# Altium PCB Remote_ASK_PCB.PcbDoc
Units mm, origin at the board's own origin, x right, y up, seen from the top; angles counter-clockwise.
Board outline 40 x 41.27 mm, 2 copper layers (Top Layer, Bottom Layer), stack 1.569 mm thick; 28 components, 18 nets, 88 pads, 0 vias.
Unrouted connection lines stored in the file: 3.
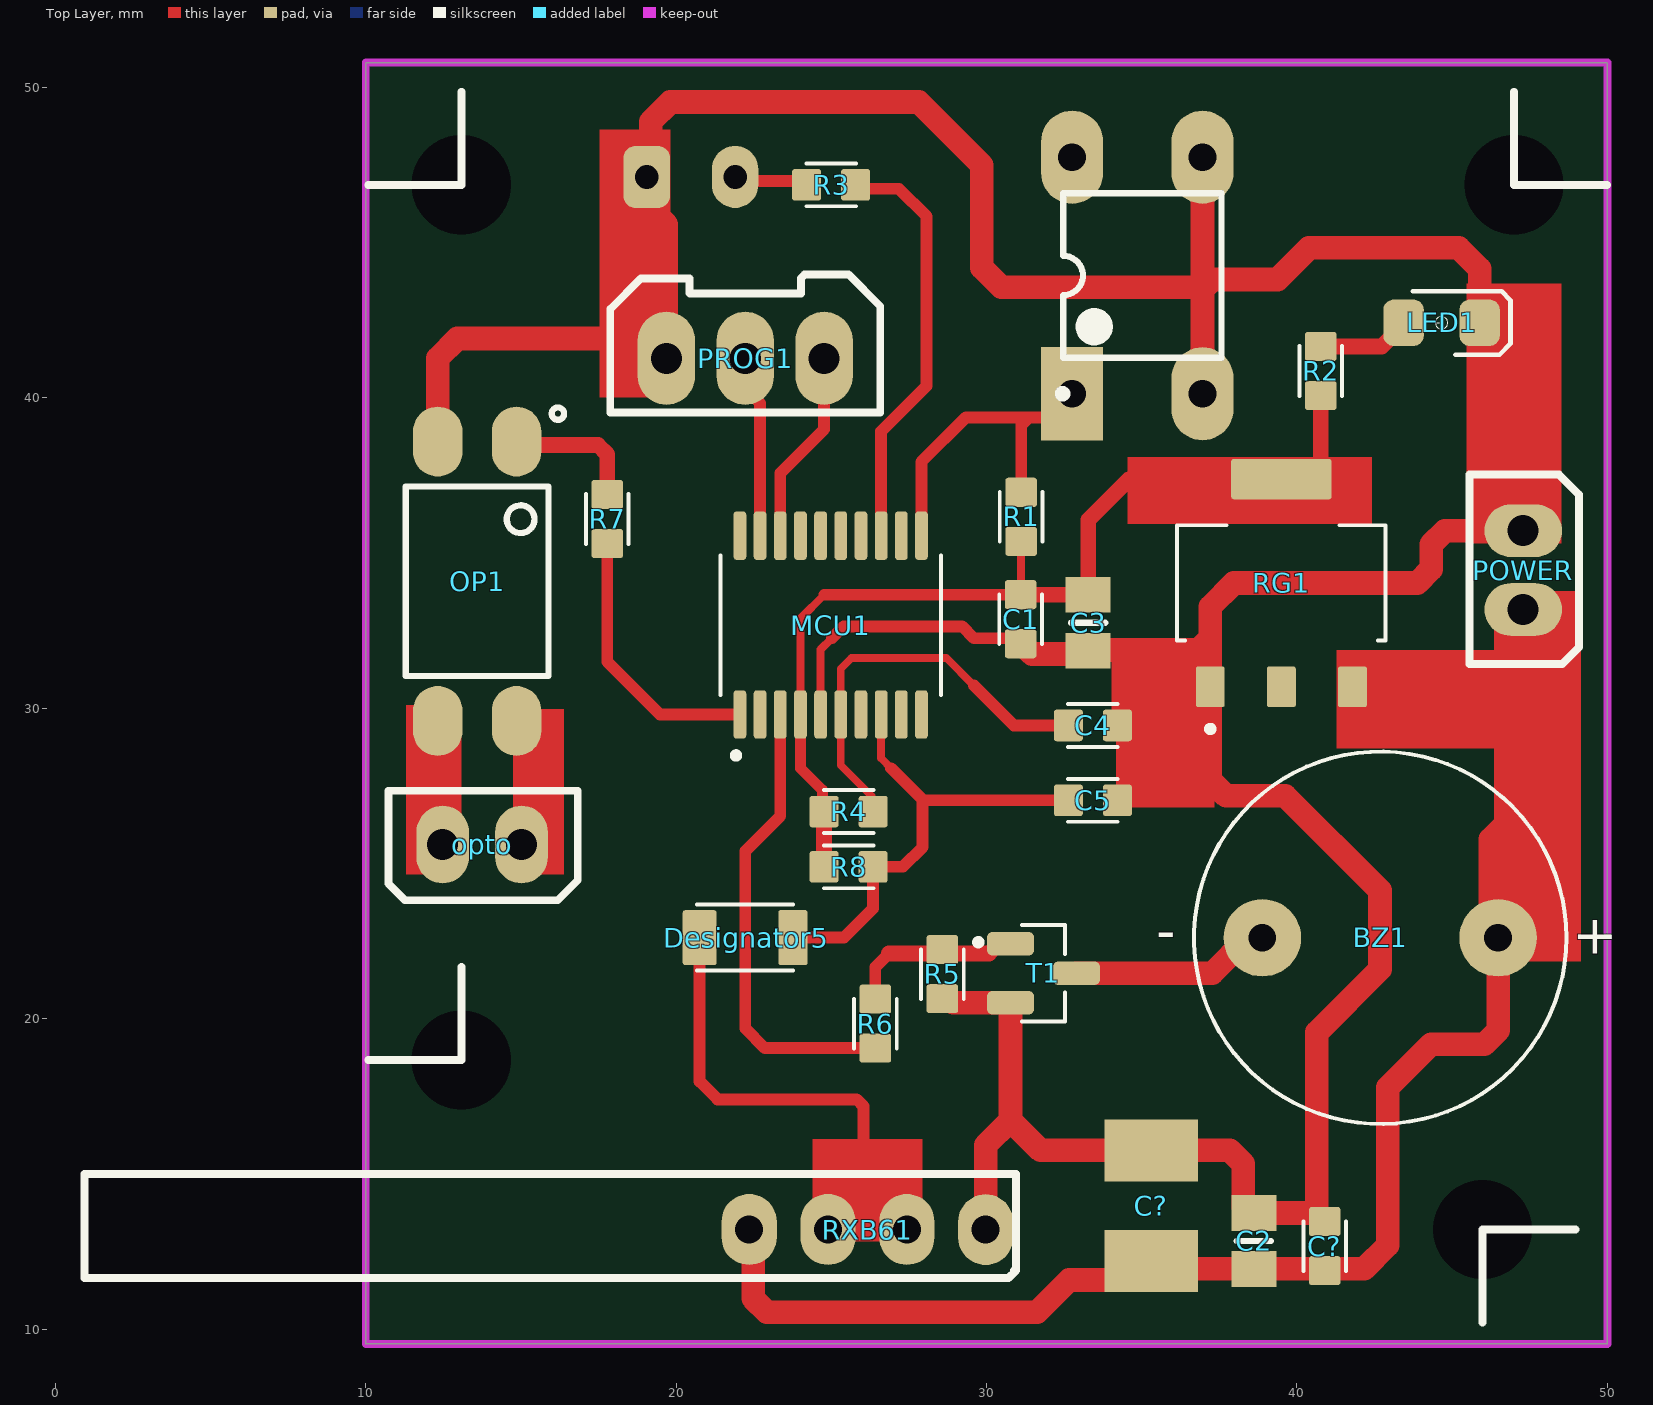
[diagram p0: Top Layer view]
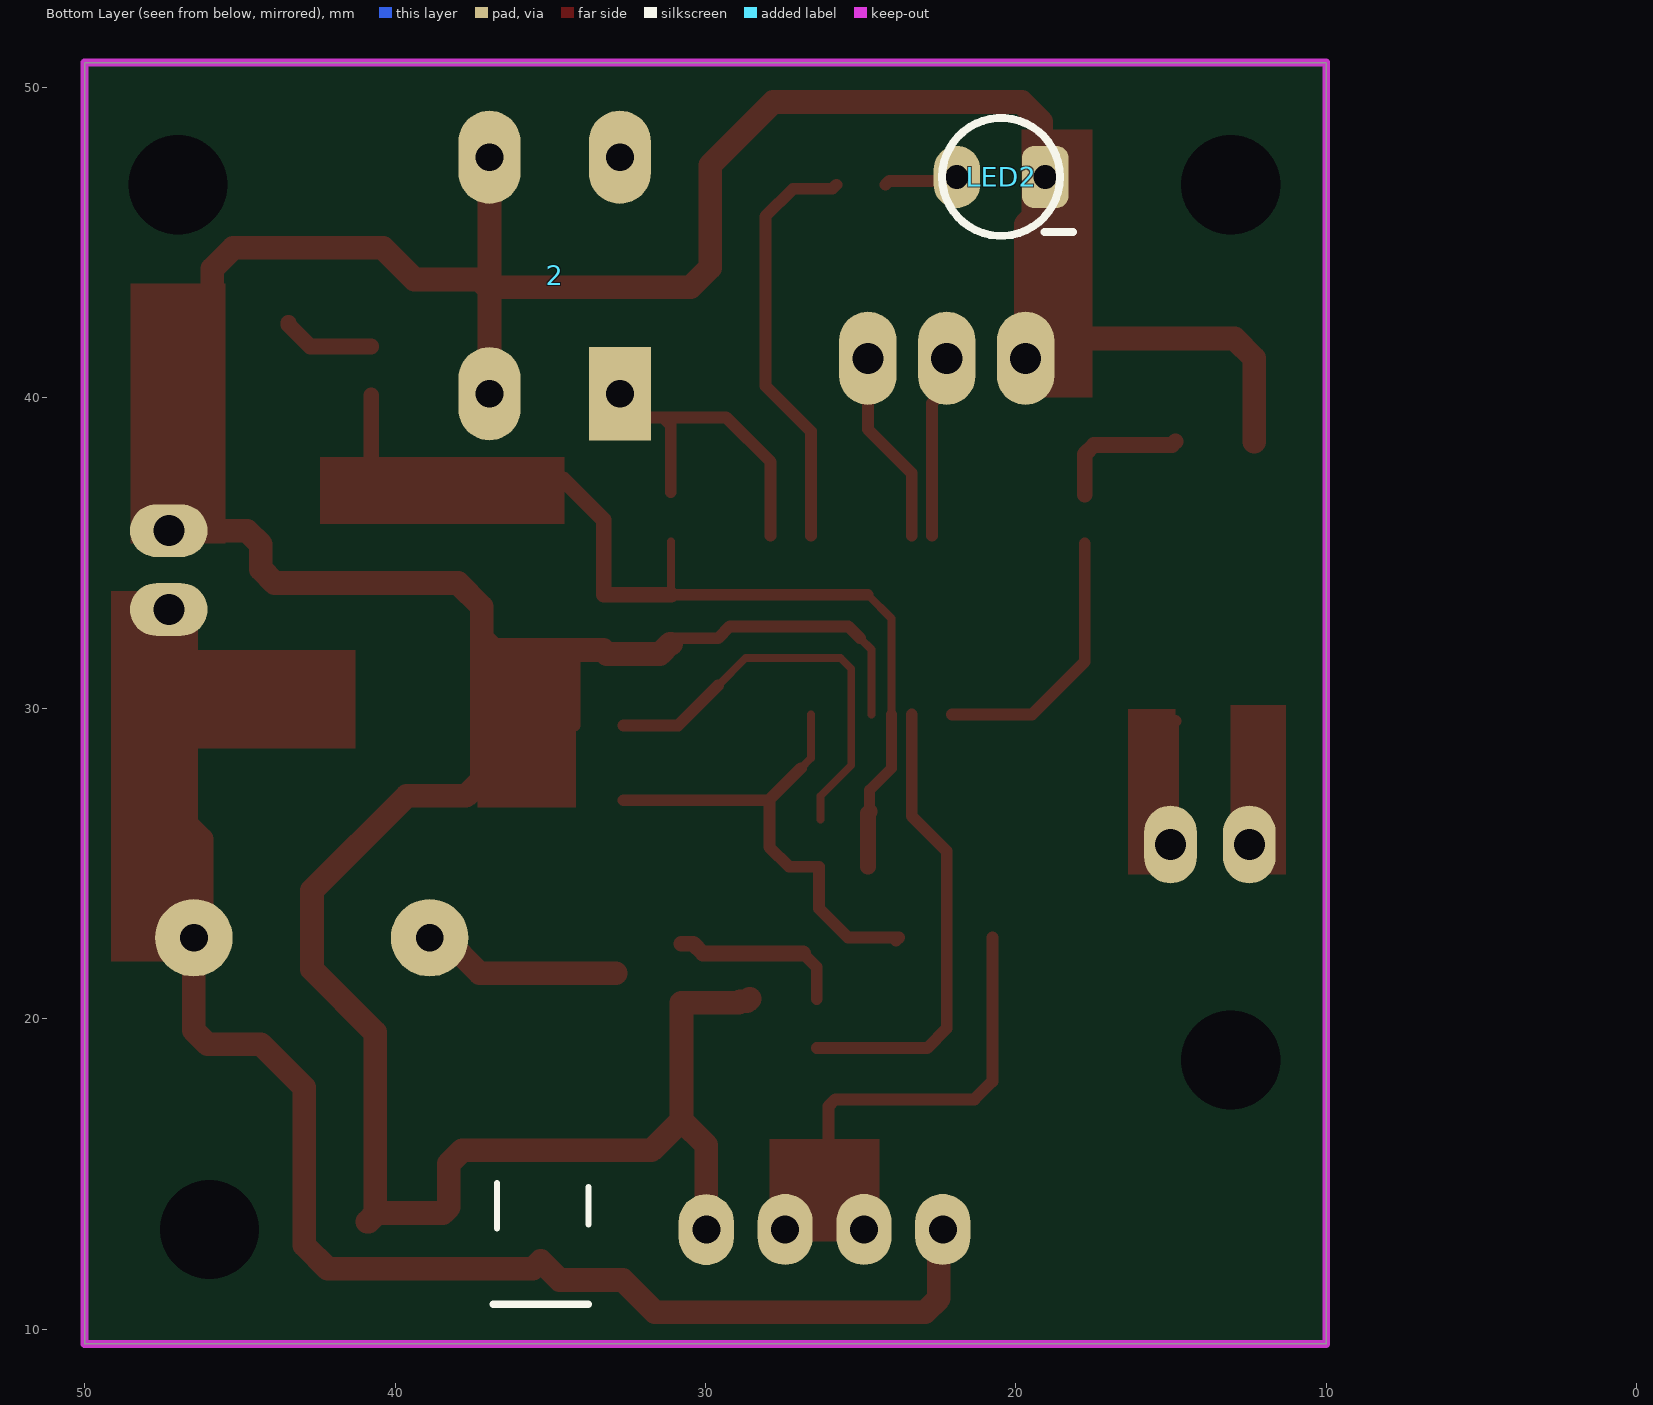
[diagram p1: Bottom Layer view, seen from below]
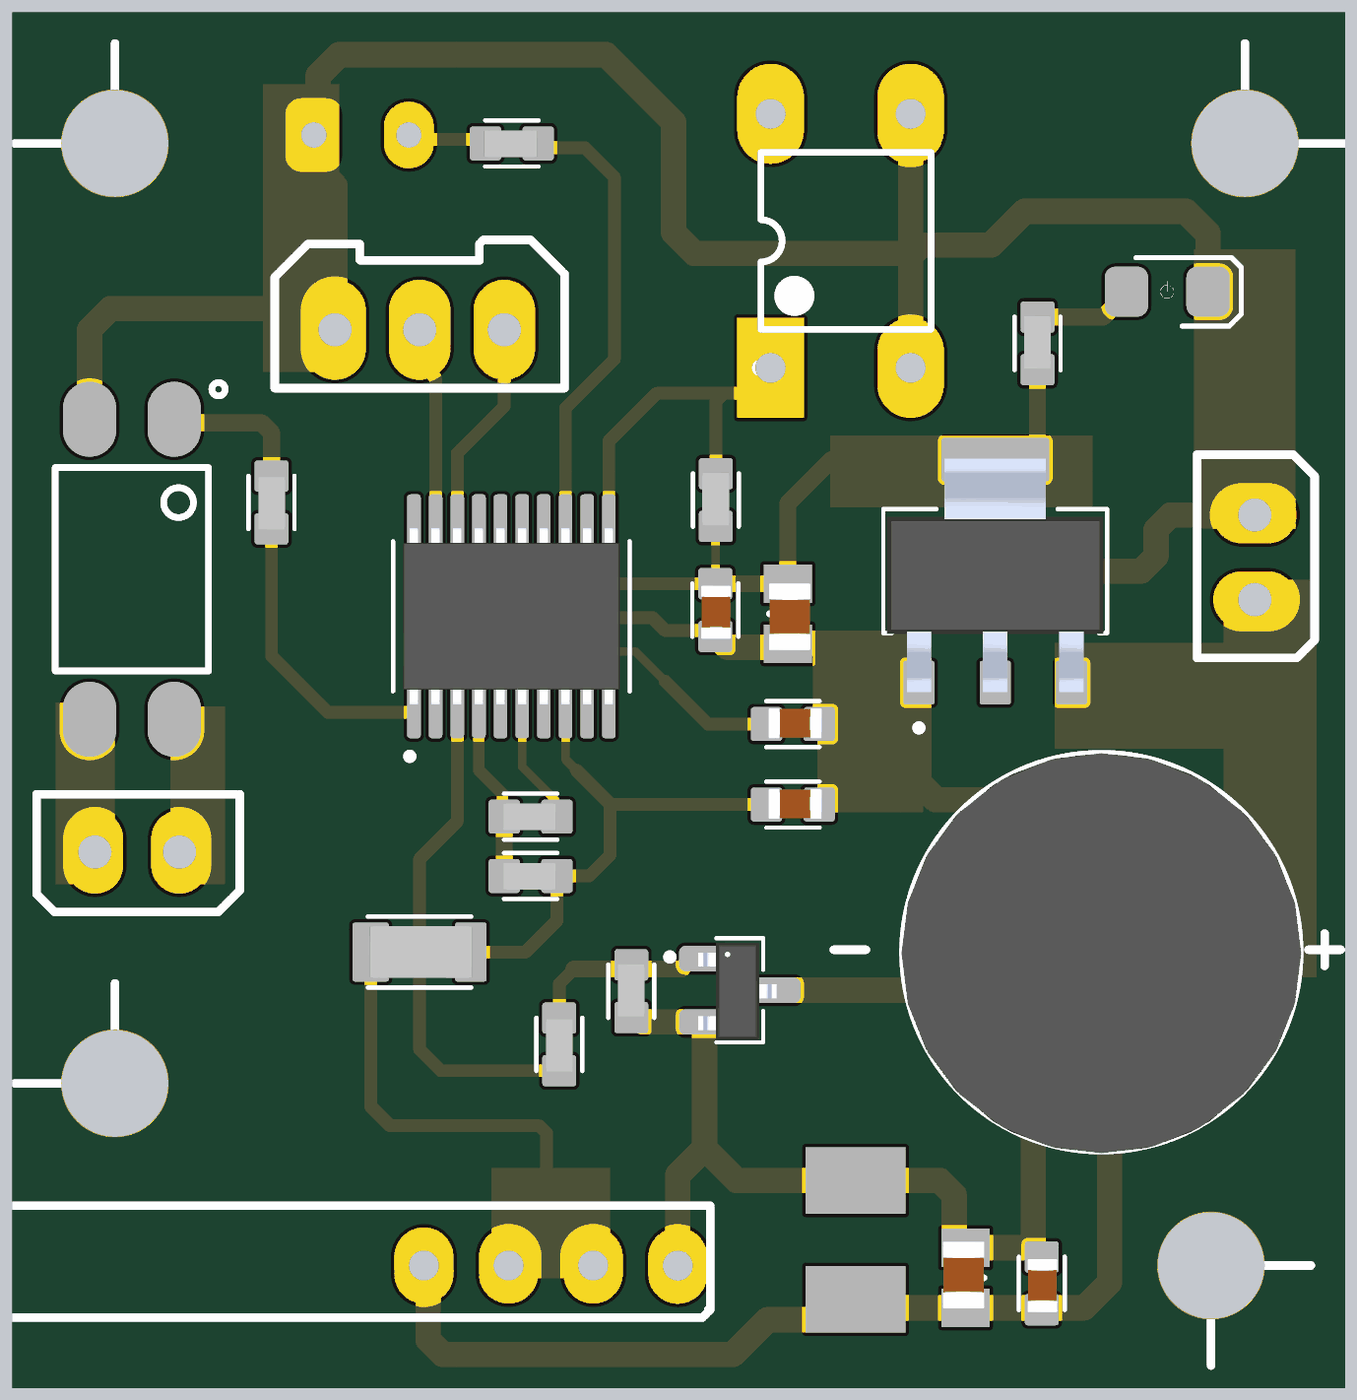
[diagram p2: 3D render of the assembled board from above, using the file's embedded part models]

## Layer stack, top to bottom
Top Solder: solder mask 0.0254, SM-001, Dk 4
Top Layer: signal copper 0.035
Dielectric 1: core 1.4986, Core-043, Dk 4.3
Bottom Layer: signal copper 0.035
Bottom Solder: solder mask 0.0254, SM-001, Dk 4

## Board outline
10,9.525 10,50.8 50,50.8 50,9.525

## Design rules (kind name [scope] priority, off if disabled: settings)
Clearance [All] p1: gap=0.178 ignorepadtopadclearanceinfootprint=FALSE
PolygonConnect [All] p1: connectstyle=Relief reliefconductorwidth=0.254 reliefentries=4 polygonreliefangle="90 Angle" airgapwidth=0.254
RoutingVias [All] p1: holewidth=0.711 width=1.27 viastyle="Through Hole" minholewidth=0.711 minwidth=1.27 maxholewidth=0.711 maxwidth=1.27
SolderMaskExpansion [All] p1: expansion=0.102 istentingtop=FALSE
Width [All] p1: maxlimit=0.762 minlimit=0.178 preferedwidth=0.254 minimp=50.000000 maximp=50.000000 favimp=50.000000
30 further rules are at their usual default settings.

## Classes and differential pairs
component class Remote_ASK_PCB: 2 BZ1 C1 C2 C3 C4 C? LED1 LED2 MCU1 OP1 opto POWER PROG1 R1 R2 R3 R4 R5 R6 R7 RG1 RXB61 T1

## Components (designator, comment, footprint, x,y, rotation, side; value= is the part's Value field where it differs from the comment)
2 "micro_sw" micro_sw 35.019,43.942 r180 bottom
BZ1 "BUZZER-5V" BUZZER-5V 46.492,22.606 r180 top
C1 "100nF" CAP-0603 31.115,32.766 r270 top
C2 "10uF" CAP-0805 38.63,13.763 r270 top
C3 "10uF" CAP-0805 33.252,31.83 r90 top
C4 "100nF" CAP-0603 33.528,29.464 r0 top
C5 "100nF" CAP-0603 33.528,27.051 r0 top (schematic designator C4)
C? "cap-electrolit" "Tantalum Case B" 35.306,13.974 r90 bottom
C? "100nF" CAP-0603 40.911,12.569 r270 top
Designator5 "Comment" RES/1206 22.225,22.479 r0 top
LED1 "G" LED/0805 45.884,42.418 r180 top
LED2 "LED-1COLER" led/3MM/DIP 19.05,47.117 r0 bottom
MCU1 "STM32G030F6P6" stm32G030F6P6 24.978,32.68 r90 top
OP1 "pc817" pc817 13.45,33.892 r270 top
opto "xh1" CONECTOR/XH/2PIN 14.986,25.654 r180 top
POWER "xh" CONECTOR/XH/2PIN 47.244,35.687 r270 top
PROG1 "XH3" XH3 19.709,41.299 r0 top
R1 "1K" RES/0603 31.115,36.068 r270 top
R2 "1K" RES/0603 40.767,40.767 r270 top
R3 "1K" RES/0603 25.09,46.863 r0 top
R4 "1K" RES/0603 25.654,26.67 r0 top
R5 "1K" RES/0603 28.575,21.336 r270 top
R6 "1K" RES/0603 26.416,19.939 r90 top
R7 "1K" RES/0603 17.78,36.195 r90 top
R8 "1K" RES/0603 25.654,24.892 r0 top (schematic designator R4)
RG1 "AMS1117" AMS1117 39.497,33.782 r90 top
RXB61 "ask_reciver" ask_reciver 29.972,13.208 r180 top
T1 "2N7002" SOT23 30.767,22.413 r180 top

## Footprints (in the part's own frame and the unit in brackets; to place one, negate y for a bottom-side part, rotate by r counter-clockwise, add the part's x,y. Pads: shape width x height; smd on the part's side, far side on the other; paste and mask are expansions set on the pad)
AMS1117 [mm]
  rrect15% 1.31x0.93 smd: 1(-3.091,2.29) 2(-3.091,0) 3(-3.091,-2.29)
  rrect15% 1.31x3.24 smd: 4(3.599,0)
  silkscreen extent -4.55,-3.36 2.11,3.36, body extent -3.37,-3.25 3.63,3.25, height 1.73
ask_reciver [mil]
  oval 70x90 hole 35.43: data(100,0) data(200,0) gnd(0,0.2) vcc(300,0)
  silkscreen extent -38,-71 1143,62
BUZZER-5V [mm]
  round 2.5 hole 0.9: N(7.61,0) P(0.01,0)
  silkscreen extent -2.19,-6 9.81,6, body extent -2.19,-5.97 9.81,6.03, height 8.5
CAP-0603 [mm]
  rrect20% 0.94x1.02 smd: 1(-0.893,-0.017) 2(0.687,-0.017)
  silkscreen extent -0.9,-0.71 0.7,0.67, body extent -0.84,-0.44 0.76,0.46, height 0.77
CAP-0805 [mm]
  rect 1.15x1.45 smd: 1(0.025,-0.022) 2(1.825,-0.022)
  silkscreen extent 0.93,-0.57 0.93,0.53, body extent -0.17,-0.71 1.84,0.54, height 0.94
CONECTOR/XH/2PIN [mm]
  oval 1.7x2.5 hole 1: 1(-0.033,0.044) 2(2.507,0.044)
  silkscreen extent -1.84,-1.69 4.26,1.84
led/3MM/DIP [mm]
  oval 1.5x2 hole 0.762: A(2.85,0)
  rrect50% 1.5x2 hole 0.762: K(0,0)
  silkscreen extent -0.89,-1.9 3.32,1.9
LED/0805 [mm]
  rrect50% 1.3x1.5 smd: A(2.45,0) K(0,0)
  silkscreen extent -0.99,-1.02 2.16,1.03
micro_sw [mm]
  oval 2x3 hole 0.9: 1(-1.938,-3.81) 1(-1.938,3.81) 2(2.262,3.81)
  rect 2x3 hole 0.9: 2(2.262,-3.81)
  body extent -2.5,-3.15 2.5,3.15, height 5.6
pc817 [mm]
  oval 2.25x1.6 smd: 1(-4.699,1.409) 2(-4.699,-1.131) 3(4.301,-1.131) 4(4.301,1.409)
  silkscreen extent -5.8,-2.16 2.85,2.94
RES/0603 [mm]
  rrect20% 0.94x1.02 smd: 1(-0.889,0) 2(0.691,0)
  silkscreen extent -0.9,-0.69 0.7,0.69, body extent -0.93,-0.41 0.67,0.39, height 0.43
RES/1206 [mm]
  rrect14% 1.09x1.77 smd: 1(-1.469,0.131)
  rrect14% 0.94x1.77 smd: 2(1.536,0.131)
  silkscreen extent -1.55,-0.93 1.55,1.2, body extent -1.51,-0.64 1.59,0.91, height 0.55
SOT23 [mil]
  rrect50% 60x30 smd: 1(-0.24,0) 2(-83.7,37.4) 3(-0.24,74.8)
  silkscreen extent -70,-24 45,99, body extent -86,-19 7,96, height 44
stm32G030F6P6 [mm]
  rrect50% 1.56x0.41 smd: 1(-2.88,2.925) 2(-2.88,2.275) 3(-2.88,1.625) 4(-2.88,0.975) 5(-2.88,0.325) 6(-2.88,-0.325) 7(-2.88,-0.975) 8(-2.88,-1.625) 9(-2.88,-2.275) 10(-2.88,-2.925) 11(2.88,-2.925) 12(2.88,-2.275) 13(2.88,-1.625) 14(2.88,-0.975) 15(2.88,-0.325) 16(2.88,0.325) 17(2.88,0.975) 18(2.88,1.625) 19(2.88,2.275) 20(2.88,2.925)
  silkscreen extent -4.3,-3.55 2.25,3.55, body extent -3.2,-3.25 3.2,3.25, height 0.53
"Tantalum Case B" [mm]
  rect 2x3 smd far side: +(-1.782,0) -(1.782,0)
  silkscreen extent -3.17,-1.54 0.73,1.52
XH3 [mm]
  oval 1.85x3 hole 1: 1(-0.024,-0.024) 2(2.516,-0.024) 3(5.056,-0.024)
  silkscreen extent -1.83,-1.78 6.87,2.67

## Part data
C1 C2 C3 C4 C5 C?: library part cap_smd
LED1: library part LED-1COLER
opto POWER: library part CONECTOR/XH/2PIN
R1 R2 R3 R4 R5 R6 R7 R8: library part RES/SMD
T1: library part NPN

## Free pads (board coordinates)
  round 1.524 hole 3.2: 16(13.081,18.669) 16(13.081,46.863) 16(45.974,13.208) 16(46.99,46.863)

## Nets (pads, with @x,y where several pads share a name; then routed paths per layer and width w, separated by ;. In a path a pad name is that pad's centre, name@x,y a point inside that pad or via, vN(x,y) a via of type N, cw(c..) or ccw(c..) an arc to the next point about the centre after c; other vN are vias at no path point)
+3.3: C1.1 C3.2 MCU1.4 R1.2 R2.2 R4.1 R8.1 RG1.2 RG1.4 | length 32.5
  Top Layer w0.254: MCU1.4 24.003,32.893 24.769,33.659 ; C1.1 31.107,33.668 31.107,35.368 R1.2
  Top Layer w0.35: MCU1.4 24.003,28.067 24.709,27.361 R4.1@24.709,26.67
  Top Layer w0.381: 24.769,33.659 C1.1
  Top Layer w0.508: R4.1@24.709,26.67 24.765,26.614 R8.1 ; C1.1 31.1,33.657 33.272,33.657 C3.2 33.274,36.068 34.587,37.381 RG1.4 40.366,37.381 40.767,37.782 R2.2
+5: BZ1.P C2.2 C?.2 C?.+ POWER.2 RG1.3 RXB61.vcc | length 53
  Top Layer w0.762: RXB61.vcc 22.479,13.081 22.479,10.987 22.925,10.541 31.623,10.541 32.663,11.581 34.695,11.581 C?.+ 35.56,11.938 C2.2 40.894,11.938 42.164,11.938 42.926,12.7 42.926,17.78 44.323,19.177 46.036,19.177 46.482,19.623 BZ1.P 46.228,22.86 46.228,25.781 47.288,26.841 47.288,30.734 ; RG1.3 47.245,30.691 47.288,30.734 ; POWER.2 47.288,30.734
BZ: MCU1.3 R6.1 | length 15
  Top Layer w0.381: MCU1.3 23.353,26.528 22.225,25.4 22.225,19.685 22.86,19.05 R6.1
data: C5.1 Designator5.1 Designator5.2 MCU1.8 R8.2 RXB61.data | length 33.1
  Top Layer w0.254: MCU1.8 26.603,28.388 26.924,28.067
  Top Layer w0.381: Designator5.1 20.756,17.979 21.336,17.399 25.812,17.399 26.035,17.176 26.035,14.605 24.892,13.462 24.892,13.208 RXB61.data@27.432,13.208 ; Designator5.2@23.861,22.51 Designator5.2 25.404,22.61 26.345,23.551 R8.2 27.305,24.892 27.94,25.527 27.94,27.051 ; 26.924,28.067 27.94,27.051 ; C5.1 27.957,27.034 27.94,27.051
GND: 2.1 C1.2 C2.1 C3.1 C4.2 C5.2 C?.1 C?.- LED1.K LED2.K MCU1.5 OP1.2 POWER.1 PROG1.1 R5.2 RG1.1 RXB61.gnd T1.3 | length 143.6
  Top Layer w0.254: MCU1.5 24.653,31.892 25.019,32.258
  Top Layer w0.381: 25.019,32.258 25.4,32.639 29.21,32.639 29.591,32.258 30.919,32.258 C1.2 ; C4.2 34.215,31.675 34.417,31.877
  Top Layer w0.762: OP1.2 12.319,41.275 12.954,41.91 19.182,41.91 PROG1.1@19.685,41.407 ; PROG1.1 PROG1.1@19.685,41.407 ; R5.2 28.664,20.556 28.882,20.556 28.925,20.513 T1.3 30.773,16.725 ; RXB61.gnd 29.972,15.924 30.773,16.725 ; C1.2 31.138,32.079 31.467,31.75 33.169,31.75 33.296,31.877 34.417,31.877 36.826,31.877 37.207,32.258 ; 2.1@36.957,40.132 36.957,43.496 ; 2.1@36.957,47.752 36.957,43.815 36.957,43.561 ; C?.1 40.854,13.462 C?.1@40.765,13.551 ; PROG1.1@19.685,41.407 19.685,45.583 19.177,46.091 19.177,47.117 19.177,48.895 19.812,49.53 27.813,49.53 29.845,47.498 29.845,44.196 30.48,43.561 36.957,43.561 ; 30.773,16.725 31.742,15.756 C?.- 37.838,15.756 38.227,15.367 38.264,15.33 38.264,13.932 38.458,13.738 C2.1 40.578,13.738 C?.1@40.765,13.551 ; 36.957,43.496 36.957,43.561 ; 36.957,43.496 37.276,43.815 39.37,43.815 40.386,44.831 45.212,44.831 45.884,44.159 LED1.K 45.884,42.318 46.153,42.049 47.211,42.049 47.288,41.971 POWER.1 44.769,35.72 44.323,35.274 44.323,34.482 43.877,34.036 37.973,34.036 37.207,33.27 37.207,32.258 ; 37.207,32.258 37.207,31.877 RG1.1 37.207,27.69 37.719,27.178 39.624,27.178 42.672,24.13 42.672,21.59 40.64,19.558 40.64,13.716 40.765,13.591 C?.1@40.765,13.551
LED: MCU1.13 R3.2 | length 13.6
  Top Layer w0.381: R3.2 25.908,46.736 27.178,46.736 28.067,45.847 28.067,40.386 26.603,38.922 MCU1.13
NetBZ1_N: BZ1.N T1.2 | length 6.5
  Top Layer w0.762: T1.2 37.269,21.463 38.412,22.606 BZ1.N
NetC4_1: C4.1 MCU1.6 R4.2 | length 13.6
  Top Layer w0.254: R4.2@26.289,26.416 26.289,27.178 25.303,28.164 MCU1.6 25.303,31.272 25.654,31.623 28.702,31.623 29.591,30.734
  Top Layer w0.381: 29.591,30.734 30.878,29.447 C4.1
NetLED1_A: LED1.A R2.1 | length 3
  Top Layer w0.508: R2.1 42.734,41.656 43.434,42.356 LED1.A
NetLED2_A: LED2.A R3.1 | length 2.4
  Top Layer w0.381: LED2.A 22.027,46.99 24.074,46.99 R3.1
NetOP1_1: OP1.1 R7.2 | length 4.4
  Top Layer w0.508: OP1.1 14.969,38.481 17.482,38.481 17.78,38.183 R7.2
NetOP1_3: OP1.3 opto.2 | length 4
  Top Layer w0.381: OP1.3 12.399,29.511 12.399,25.69 opto.2
NetOP1_4: OP1.4 opto.1 | length 4
  Top Layer w0.381: OP1.4 14.939,29.511 14.939,25.69 opto.1
NetR5_1: R5.1 R6.2 T1.1 | length 5.7
  Top Layer w0.381: R6.2 26.416,21.661 26.853,22.098
  Top Layer w0.508: 26.853,22.098 30.077,22.098 30.392,22.413 T1.1
OPTO: MCU1.1 R7.1 | length 8.8
  Top Layer w0.381: R7.1 17.78,31.496 19.476,29.8 MCU1.1
SW: 2.2 MCU1.11 R1.1 | length 10.9
  Top Layer w0.381: MCU1.11 27.903,37.936 29.337,39.37 31.369,39.37 ; R1.1 31.115,39.116 31.369,39.37 ; 2.2@32.757,40.132 31.995,39.37 31.369,39.37
  Top Layer w0.508: 2.2@32.757,40.132 2.2@32.893,40.268
SWCLK: MCU1.19 PROG1.2 | length 5.9
  Top Layer w0.381: PROG1.2 22.225,40.302 22.703,39.824 MCU1.19
SWDIO: MCU1.18 PROG1.3 | length 6.3
  Top Layer w0.381: MCU1.18 23.353,37.577 24.765,38.989 PROG1.3
pads on no net: MCU1.2 MCU1.7 MCU1.9 MCU1.10 MCU1.12 MCU1.14 MCU1.15 MCU1.16 MCU1.17 MCU1.20

## Keep-outs
Keep-Out Layer:
  the board outline again, w0.254

## Other copper
Top Layer:
  rectangle net GND: 17.526,40.005 19.812,48.641
  rectangle net GND: 45.466,35.306 48.514,43.688
  rectangle net data: 24.384,12.827 27.94,16.129
  rectangle net NetOP1_3: 11.303,24.638 13.081,30.099
  rectangle net NetOP1_4: 14.859,24.638 16.383,29.972
  rectangle net GND: 34.163,26.797 37.338,32.004
  rectangle net +5: 46.355,21.844 49.149,33.782
  rectangle net +5: 41.275,28.702 47.625,31.877
  rectangle net +3.3: 34.544,35.941 42.418,38.1

## Silkscreen, mask and mechanical layers (free items; w line width, h text height)
Top Overlay:
  lines w0.254: 10.081,18.669 13.081,18.669 13.081,21.669 ; 10.081,46.863 13.081,46.863 13.081,49.863 ; 45.974,10.208 45.974,13.208 48.974,13.208 ; 46.99,49.863 46.99,46.863 49.99,46.863

## Text inside footprints (layer, text, board x,y; h text height)
BZ1: Top Overlay "-" at 36.089,23.177 h1.27 r180; Top Overlay "+" at 50.338,23.177 h1.27 r180